# Altium PCB OLD_SDC-BSPD-rev2.PcbDoc (part 2 of 2)
Units mm, origin at the board's own origin, x right, y up, seen from the top; angles counter-clockwise.
Board outline 140.5 x 98.9 mm, 2 copper layers (Top Layer, Bottom Layer); 82 components, 50 nets, 263 pads, 54 vias.
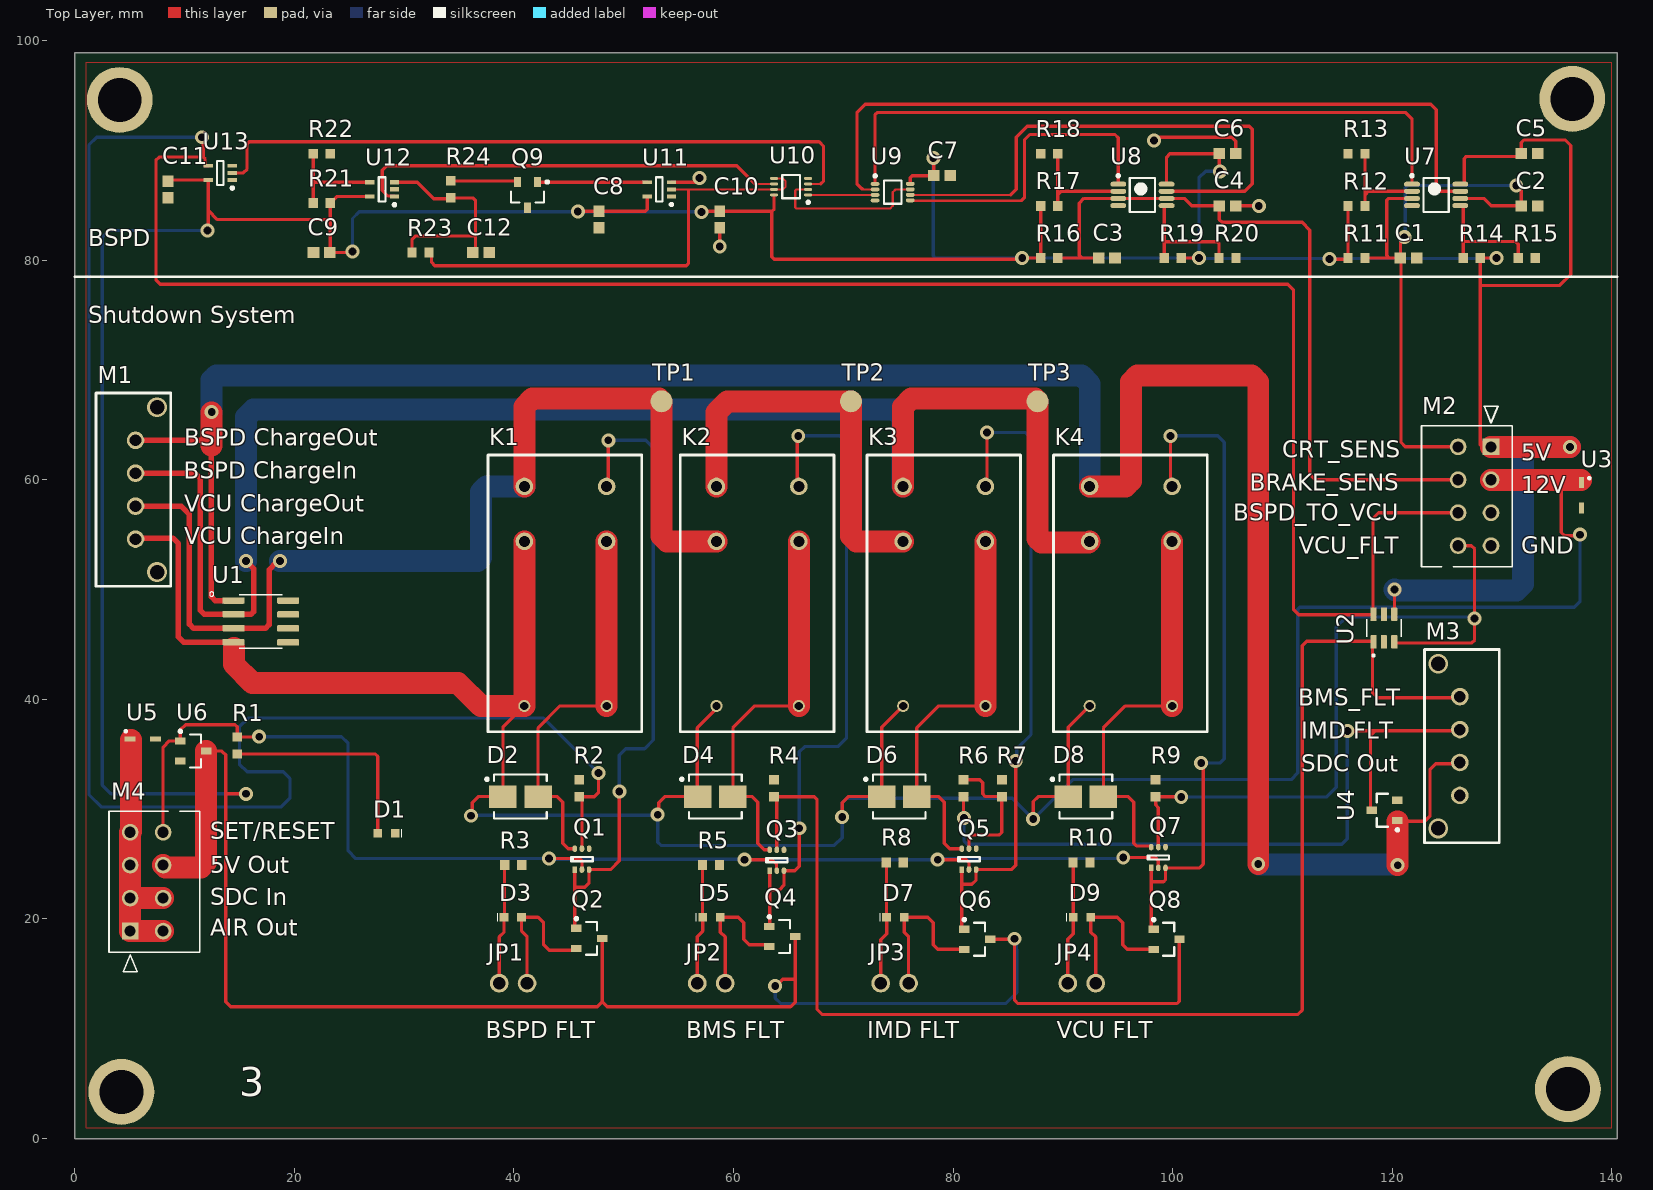
[diagram p0: Top Layer view]

## Via types
v1: diameter 1.27, hole 0.711, Top Layer to Bottom Layer, 50 vias
v2: diameter 1.8, hole 1.32, Top Layer to Bottom Layer, 4 vias

## Nets (pads, with @x,y where several pads share a name; then routed paths per layer and width w, separated by ;. In a path a pad name is that pad's centre, name@x,y a point inside that pad or via, vN(x,y) a via of type N, cw(c..) or ccw(c..) an arc to the next point about the centre after c; other vN are vias at no path point) (continued)
NetK4_4: (continued)
  Top Layer w2: 12.45,63.1 v1@12.45,66.15 ; K4.4 95.7,59.4 96.2,59.9 96.2,68.9 96.8,69.5 107.2,69.5 107.8,68.9 v1(107.8,25) ; v1@120.475,24.925 U4.1@120.475,28.9
  Bottom Layer w0.3: v1(107.8,25) v1@107.85,24.95 ; v1@120.45,24.95 v1(120.5,24.9)
  Bottom Layer w2: v1(12.475,66.175) 12.475,69.075 12.9,69.5 91.7,69.5 92.45,68.75 K4.4 ; v1@107.85,24.95 v1@120.45,24.95
NetM2_7: M2.7 Q1.5 R2.1 U2.6 U13.4 | length 318.2
  Top Layer w0.3: v1@11.699,90.999 11.699,89.4 ; U13.4 11.9,88.6 11.875,88.625 11.875,89.224 11.699,89.4 ; Q1.5 46.2,30.875 R2.1 47.325,31.125 47.7,31.5 v1(47.7,33.3) ; M2.7 118.75,57 118.25,56.5 118.25,47.805 U2.6 118.245,47.7 111.5,47.7 111,48.2 111,77.3 110.5,77.8 7.8,77.8 7.4,78.2 7.4,89.1 7.7,89.4 11.699,89.4
  Bottom Layer w0.3: v1(11.6,91.2) 4.265,91.2 cw(c4.1,94.6) 3.935,91.2 2,91.2 1.3,90.5 1.3,31.3 2.4,30.2 18.8,30.2 19.6,31 19.6,32.8 19,33.4 15.7,33.4 15,34.1 15,37.5 15.8,38.3 42.7,38.3 v1(47.7,33.3)
NetM2_8: M2.8 Q7.5 R9.1 U2.3 | length 66.5
  Top Layer w0.3: Q7.5 98.7,30.15 98.45,30.4 R9.1 100.775,31.125 v1@100.8,31.1 ; U2.3@120.15,45.145 127.245,45.145 127.5,45.4 127.5,47.5 127.5,53.7 127.2,54 M2.8
  Bottom Layer w0.3: v1(100.787,31.113) 100.8,31.1 114,31.1 114.9,32 114.9,46.6 115.8,47.5 127.361,47.5 v1(127.5,47.361)
NetM3_1: M3.1 Q3.5 R4.1 U2.1 | length 125.2
  Top Layer w0.3: Q3.5 63.95,30.875 R4.1 67.375,31.125 67.6,30.9 67.6,11.8 68.1,11.3 111.4,11.3 111.8,11.7 111.8,44.9 112.2,45.3 118.16,45.3 118.215,45.245 U2.1 118.3,45.14 118.2,45.04 118.2,40.65 118.7,40.15 M3.1@126.11,40.15
NetM3_2: M3.2 R6.1 U4.2 | length 66.7
  Top Layer w0.3: R6.1 80.95,29.25 v1(81,29.2) ; v1(115.939,37.125) 115.964,37.15 118.45,37.15 ; U4.2@118.025,29.9 118.025,36.725 118.45,37.15 ; M3.2@126.11,37.15 118.45,37.15
  Bottom Layer w0.3: v1(81,29.2) 81,27.1 81.3,26.8 115.4,26.8 115.9,27.3 115.9,37.086 v1(115.939,37.125)
NetM4_1: M4.1 M4.2 M4.3 M4.4 M4.5 M4.6 U5.1 | length 23.6
  Top Layer w0.3: U5.1 U5.1@5.125,36.325
  Top Layer w2: U5.1@5.125,36.325 5.125,27.975 M4.4 M4.3 M4.2 ; M4.5 M4.1 M4.2 ; M4.6 M4.2
NetM4_8: M4.8 Q1.2 Q3.2 Q5.2 Q7.2 R1.1 U6.1 | length 123.1
  Top Layer w0.3: M4.8 8.05,35.65 8.615,36.215 U6.1 9.625,37.225 10.1,37.7 14.6,37.7 14.8,37.5 R1.1 16.775,36.575 v1(16.8,36.6) ; v1(43.2,25.5) 46,25.5 46.2,25.3 Q1.2 ; v1(61,25.4) 63.5,25.4 63.927,24.973 63.927,24.423 Q3.2 ; v1@78.8,25.4 81.2,25.4 81.45,25.15 Q5.2 ; v1(95.5,25.6) 98.4,25.6 98.7,25.3 Q7.2
  Bottom Layer w0.3: v1(16.8,36.6) 24.3,36.6 24.9,36 24.9,26.2 25.6,25.5 v1(43.2,25.5) 43.25,25.45 60.95,25.45 v1(61,25.4) v1(78.6,25.4) 78.7,25.5 95.4,25.5 v1(95.5,25.6)
NetQ5_5: Q5.5 R6.2 R7.1 | length 12.1
  Top Layer w0.3: R6.2 82.425,32.675 82.7,32.4 82.7,31.4 82.95,31.15 84.425,31.15 84.425,27.875 84.2,27.65 81.7,27.65 81.45,27.4 Q5.5
NetQ9_1: Q9.1 U11.4 | length 10
  Top Layer w0.3: Q9.1 42.19,87.1 U11.4
NetQ9_3: Q9.3 R24.1 | length 6.1
  Top Layer w0.3: R24.1 40.235,87.225 Q9.3
NetR19_1: R19.1 R20.2 U8.5 | length 11.3
  Top Layer w0.3: R19.1 99.225,81.675 ; U8.5 99.294,84.975 99.225,84.906 99.225,81.675 ; R20.2 104.225,81.499 104.049,81.675 99.225,81.675
NetR21_1: R21.1 R22.2 U12.4 | length 9.6
  Top Layer w0.3: R21.1 21.725,87.1 ; R22.2 21.725,87.1 ; U12.4 21.725,87.1
NetU7_1: U7.1 U9.1 | length 61.4
  Top Layer w0.3: U9.1@72.9,87.029 72.9,93.274 73.076,93.45 121.25,93.45 121.8,92.9 U7.1
NetU7_7: U7.7 U9.2 | length 71
  Top Layer w0.2: 71.75,86.504 71.8,86.454 72.459,86.454 72.463,86.45 U9.2
  Top Layer w0.3: 71.75,86.504 71.696,86.504 71.25,86.95 71.25,93.45 72,94.2 123.5,94.2 124,93.7 124,86.7 124.425,86.275 U7.7
NetU8_1: U8.1 U9.5 | length 28.9
  Top Layer w0.2: U9.5@76.381,85.421 86.221,85.421
  Top Layer w0.25: U9.5 76.119,85.431 76.371,85.431 U9.5@76.381,85.421 ; 86.221,85.421 86.25,85.45
  Top Layer w0.3: 86.25,85.45 86.5,85.7 86.5,90.95 87,91.45 94.75,91.45 95.05,91.15 U8.1
NetU8_7: U8.7 U9.6 | length 49.7
  Top Layer w0.2: U9.6 85.25,85.95
  Top Layer w0.3: 85.25,85.95 85.75,86.45 85.75,91.2 86.75,92.2 107,92.2 107.25,91.95 107.25,86.95 106.575,86.275 U8.7
NetU9_3: U9.3 U10.1 | length 6.1
  Top Layer w0.2: U10.1 U9.3
NetU9_7: U9.7 U10.2 | length 14.7
  Top Layer w0.2: U10.2 65.742,86.45 65.625,86.333 65.625,84.825 65.75,84.7 74.25,84.7 74.5,84.95 74.5,86.2 74.75,86.45 U9.7
NetU10_3: U10.3 U13.2 | length 61.3
  Top Layer w0.2: U10.3 67.95,86.95
  Top Layer w0.3: U13.2 15.35,87.95 15.7,88.3 15.7,90.624 15.876,90.8 67.8,90.8 68.2,90.4 68.2,87.2 67.95,86.95
NetU10_6: U10.6 U12.1 | length 39.7
  Top Layer w0.2: 61.95,86.954 61.954,86.95 U10.6
  Top Layer w0.3: U12.1 29.079,85.846 28.533,85.846 28,86.379 28,88.2 28.4,88.6 60.304,88.6 61.95,86.954
V_LOGIC: R23.1 U10.5 U10.7 U11.2 | length 43.5
  Top Layer w0.2: U11.2 55.9,86.45 U10.7 64.5,86.45 64.75,86.7 64.75,87.2 64.5,87.45 U10.5
  Top Layer w0.3: R23.1 32.5,80.475 32.5,79.8 32.8,79.5 55.7,79.5 55.9,79.7 55.9,86.4
pads on no net: M2.3 M3.4 U2.5 U11.1 U13.1
copper on no net:
  other v2: 124.2,28.25 124.2,43.25 7.5,51.6 7.5,66.6

## Polygon pours and split planes (outlines as drawn)
GND on Top Layer "NONET_L01_P000" (solid, shelved, pour order 0): 1,98 1,1 140,1 140,98
GND on Bottom Layer "NONET_L02_P001" (solid, shelved, pour order 1): 1,98 1,1 140,1 140,98

## Silkscreen, mask and mechanical layers (free items; w line width, h text height)
Top Overlay:
  lines w0.254: 0,78.5 140.5,78.5
  text "BSPD" at 1.254,81.254 h1.52
  text "Shutdown System" at 1.254,74.262 h1.52
  text "BSPD ChargeOut" at 9.954,63.112 h1.52
  text "CRT_SENS" at 110.004,62.008 h1.52
  text "5V" at 131.754,61.754 h1.52
  text "BSPD ChargeIn" at 9.926,60.106 h1.52
  text "BRAKE_SENS" at 107.004,59.008 h1.52
  text "12V" at 131.754,58.754 h1.52
  text "VCU ChargeOut" at 9.954,57.112 h1.52
  text "BSPD_TO_VCU" at 105.504,56.258 h1.52
  text "VCU ChargeIn" at 9.954,54.112 h1.52
  text "VCU_FLT" at 111.504,53.258 h1.52
  text "GND" at 131.754,53.254 h1.52
  text "BMS_FLT" at 111.454,39.408 h1.52
  text "IMD FLT" at 111.704,36.404 h1.52
  text "SDC Out" at 111.704,33.404 h1.52
  text "SET/RESET" at 12.354,27.254 h1.52
  text "5V Out" at 12.354,24.154 h1.52
  text "SDC In" at 12.354,21.254 h1.52
  text "AIR Out" at 12.354,18.454 h1.52
  text "BSPD FLT" at 37.454,9.154 h1.52
  text "BMS FLT" at 55.704,9.154 h1.52
  text "IMD FLT" at 72.204,9.154 h1.52
  text "VCU FLT" at 89.454,9.154 h1.52
  text "3" at 15,3 h4.5
Bottom Overlay:
  text "BSPD ChargeOut" at 30.446,63.112 h1.52
  text "CRT_SENS" at 121.746,62.008 h1.52
  text "5V" at 134.246,61.754 h1.52
  text "BSPD ChargeIn" at 30.446,60.112 h1.52
  text "BRAKE_SENS" at 121.746,59.008 h1.52
  text "12V" at 135.614,58.754 h1.52
  text "VCU ChargeOut" at 30.446,57.112 h1.52
  text "BSPD_TO_VCU" at 121.746,56.258 h1.52
  text "VCU ChargeIn" at 30.446,54.112 h1.52
  text "VCU_FLT" at 121.746,53.258 h1.52
  text "GND" at 135.746,53.254 h1.52
  text "BMS_FLT" at 121.46,39.359 h1.52
  text "IMD FLT" at 121.696,36.404 h1.52
  text "SDC Out" at 121.446,33.404 h1.52
  text "SET/RESET" at 25.546,27.254 h1.52
  text "5V Out" at 20.446,24.054 h1.52
  text "SDC In" at 20.746,21.254 h1.52
  text "AIR Out" at 21.746,18.454 h1.52

## Dimensions
0,98.9 to 0,0 on Top Layer
0,-5 to 140.5,-0.6 on Top Layer